# Altium PCB FRDM-MCXN947__Shield_Template.PcbDoc
Units mil, origin at the board's own origin, x right, y up, seen from the top; angles counter-clockwise.
Board outline 4645.67 x 2165.35 mil, 2 copper layers (Top Layer, Bottom Layer), stack 61.7 mil thick; 10 components, 116 nets, 128 pads, 0 vias.
Unrouted connection lines stored in the file: 7.
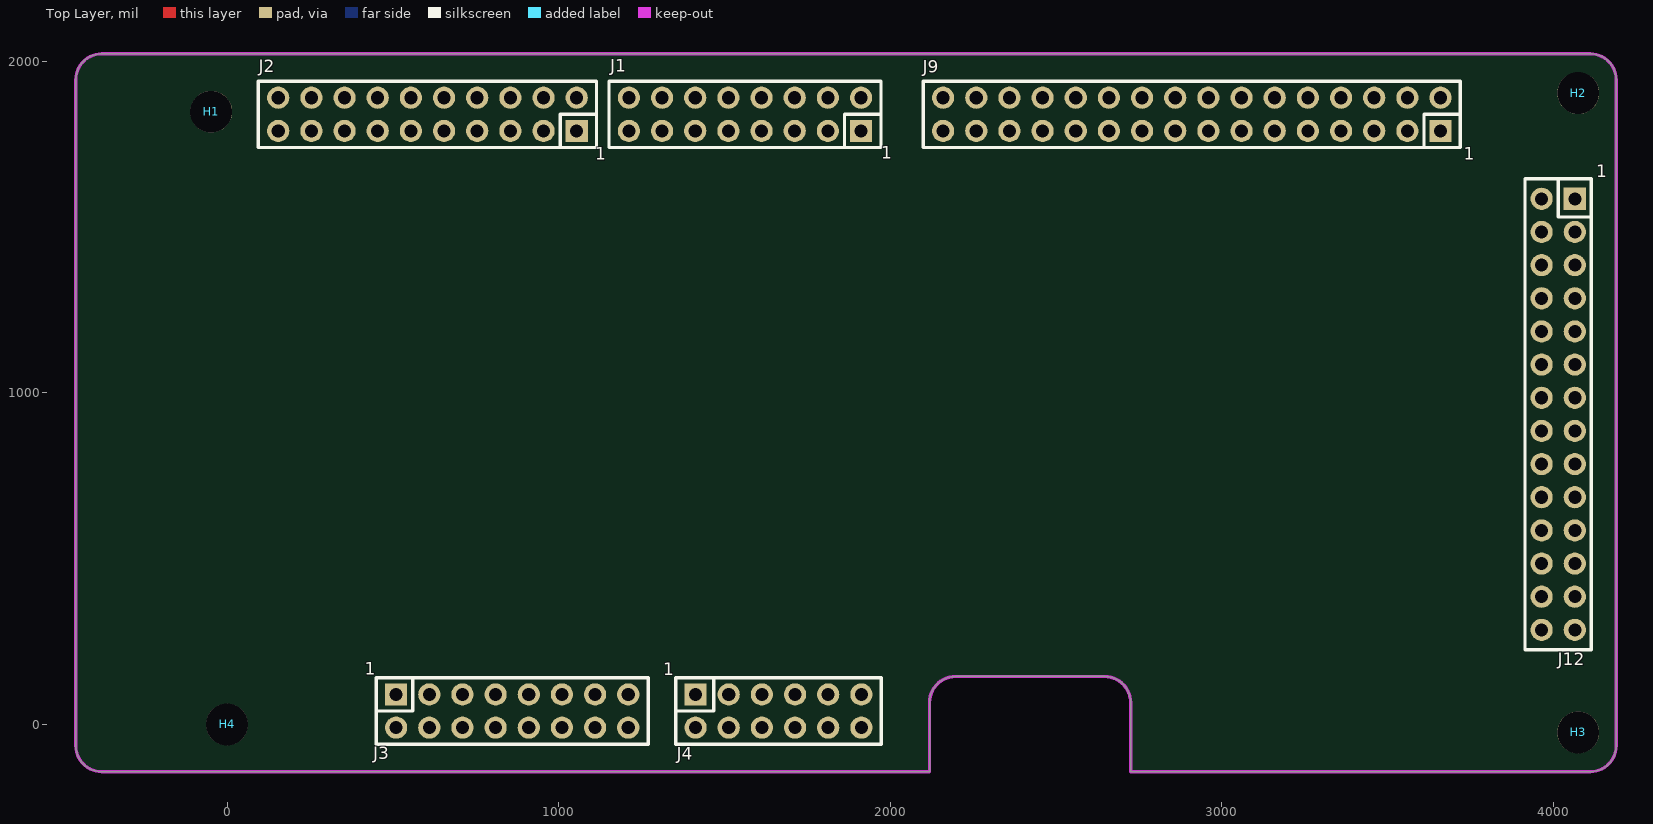
[diagram p0: Top Layer view]
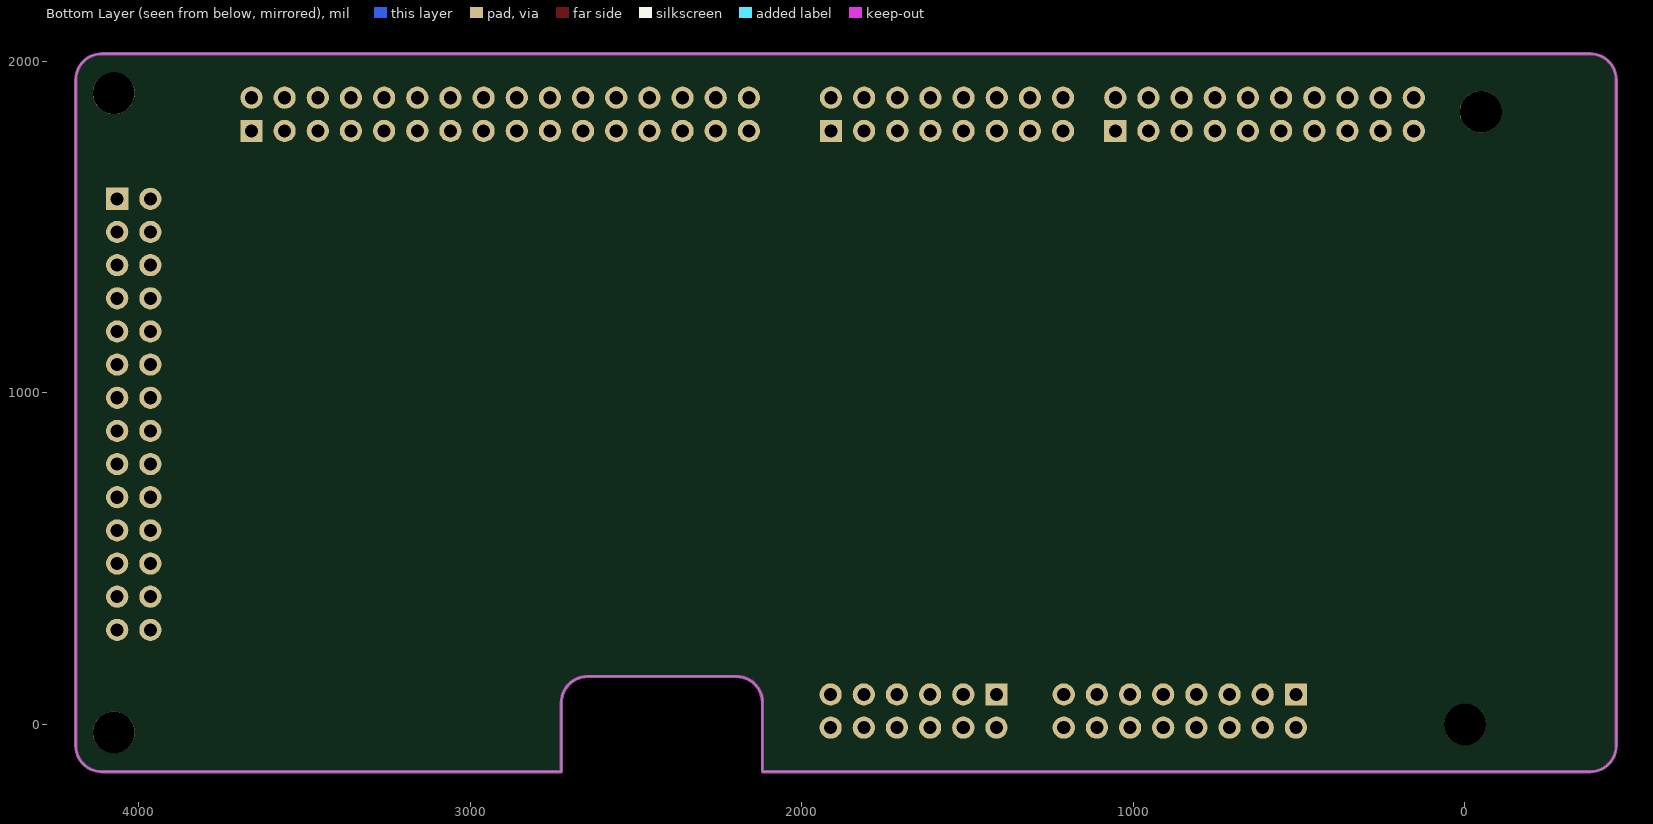
[diagram p1: Bottom Layer view, seen from below]

## Layer stack, top to bottom
Top Solder: solder mask 0.4, Solder Resist, Dk 3.5
Top Layer: signal copper 1.4
Dielectric1: dielectric 58.9, FR-4, Dk 4.8
Bottom Layer: signal copper 1.4
Bottom Solder: solder mask 0.4, Solder Resist, Dk 3.5

## Board outline
-456.18,-63.94 ccw(c-377.44,-63.94) -377.44,-142.68 2118.62,-142.68 2118.62,65.98 cw(c2197.36,65.98) 2197.36,144.72 2646.18,144.72 cw(c2646.18,65.98) 2724.92,65.98 2724.92,-142.68 4110.75,-142.68 ccw(c4110.75,-63.94) 4189.49,-63.94 4189.49,1943.94 ccw(c4110.75,1943.94) 4110.75,2022.68 -377.44,2022.68 ccw(c-377.44,1943.94) -456.18,1943.94

## Design rules (kind name [scope] priority, off if disabled: settings)
Clearance [All] p1: gap=6 ignorepadtopadclearanceinfootprint=FALSE except(0: Arc-Hole Track-Hole SMDPad-Hole THPad-Hole Via-Hole Fill-Hole Poly-Hole Region-Hole Text-Hole)
ComponentClearance [All] p1: gap=0 collisioncheckmode=3 verticalgap=0 showdistances=FALSE
HoleSize [All] p1: absolutevalues=TRUE maxlimit=250 minlimit=1 maxpercent=80.000 minpercent=20.000
MinimumSolderMaskSliver [All] p1: minsoldermaskwidth=1
PolygonConnect [All] p1: connectstyle=Relief reliefconductorwidth=10 reliefentries=4 polygonreliefangle="90 Angle" airgapwidth=10
RoutingVias [All] p1: holewidth=12 width=26 viastyle="Through Hole" minholewidth=12 minwidth=26 maxholewidth=50 maxwidth=75
SilkToSilkClearance [All] p1: silktosilkclearance=0
SilkToSolderMaskClearance SilkscreenOverComponentPads [IsPad] p1: minsilkscreentomaskgap=10 clearancetoexposedcopper=TRUE
SolderMaskExpansion [All] p1: expansion=4 istentingtop=FALSE
Width [All] p1: maxlimit=200 minlimit=6 preferedwidth=6
25 further rules are at their usual default settings.

## Components (designator, comment, footprint, x,y, rotation, side; value= is the part's Value field where it differs from the comment)
H1 "Mechanical_MountingHole" MOUNTINGHOLE_3.2MM_M3 -47.99,1847.99 r0 top value=MountingHole
H2 "Mechanical_MountingHole" MOUNTINGHOLE_3.2MM_M3 4074.72,1904.02 r0 top value=MountingHole
H3 "Mechanical_MountingHole" MOUNTINGHOLE_3.2MM_M3 4074.72,-24.02 r0 top value=MountingHole
H4 "Mechanical_MountingHole" MOUNTINGHOLE_3.2MM_M3 0,0 r0 top value=MountingHole
J1 "SSQ-108-03-T-D" SSQ-108-03-T-D 1562.01,1840 r270 top
J2 "SSQ-110-03-T-D" SSQ-110-03-T-D 604.49,1840 r270 top
J3 "SSQ-108-03-T-D" SSQ-108-03-T-D 860,40.51 r90 top
J4 "SSQ-106-03-T-D" SSQ-106-03-T-D 1662.99,40.51 r90 top
J9 "SSQ-116-03-T-D" SSQ-116-03-T-D 2909.49,1840 r270 top
J12 "SSQ-114-03-T-D" SSQ-114-03-T-D 4014.49,935.24 r0 top

## Footprints (in the part's own frame and the unit in brackets; to place one, negate y for a bottom-side part, rotate by r counter-clockwise, add the part's x,y. Pads: shape width x height; smd on the part's side, far side on the other; paste and mask are expansions set on the pad)
MOUNTINGHOLE_3.2MM_M3 [mm]
  round 3.2 hole 3.2 unplated paste-2539.97 mask+0: Un1(0,0)
SSQ-106-03-T-D [mm]
  rect 1.7x1.7 hole 1 paste-2539.97 mask+0: 1(1.27,6.35)
  rrect100% 1.7x1.7 hole 1 paste-2539.97 mask+0: 2(-1.27,6.35) 3(1.27,3.81) 4(-1.27,3.81) 5(1.27,1.27) 6(-1.27,1.27) 7(1.27,-1.27) 8(-1.27,-1.27) 9(1.27,-3.81) 10(-1.27,-3.81) 11(1.27,-6.35) 12(-1.27,-6.35)
  silkscreen extent -2.54,-7.87 2.54,7.87, body extent -2.48,-7.87 2.48,7.87, height 8.52
SSQ-108-03-T-D [mm]
  rect 1.7x1.7 hole 1 paste-2539.97 mask+0: 1(1.27,8.89)
  rrect100% 1.7x1.7 hole 1 paste-2539.97 mask+0: 2(-1.27,8.89) 3(1.27,6.35) 4(-1.27,6.35) 5(1.27,3.81) 6(-1.27,3.81) 7(1.27,1.27) 8(-1.27,1.27) 9(1.27,-1.27) 10(-1.27,-1.27) 11(1.27,-3.81) 12(-1.27,-3.81) 13(1.27,-6.35) 14(-1.27,-6.35) 15(1.27,-8.89) 16(-1.27,-8.89)
  silkscreen extent -2.54,-10.41 2.54,10.41, body extent -2.48,-10.41 2.48,10.41, height 8.52
SSQ-110-03-T-D [mm]
  rect 1.7x1.7 hole 1 paste-2539.97 mask+0: 1(1.27,11.43)
  rrect100% 1.7x1.7 hole 1 paste-2539.97 mask+0: 2(-1.27,11.43) 3(1.27,8.89) 4(-1.27,8.89) 5(1.27,6.35) 6(-1.27,6.35) 7(1.27,3.81) 8(-1.27,3.81) 9(1.27,1.27) 10(-1.27,1.27) 11(1.27,-1.27) 12(-1.27,-1.27) 13(1.27,-3.81) 14(-1.27,-3.81) 15(1.27,-6.35) 16(-1.27,-6.35) 17(1.27,-8.89) 18(-1.27,-8.89) 19(1.27,-11.43) 20(-1.27,-11.43)
  silkscreen extent -2.54,-12.95 2.54,12.95, body extent -2.48,-12.95 2.48,12.95, height 8.52
SSQ-114-03-T-D [mm]
  rect 1.7x1.7 hole 1 paste-2539.97 mask+0: 1(1.27,16.51)
  rrect100% 1.7x1.7 hole 1 paste-2539.97 mask+0: 2(-1.27,16.51) 3(1.27,13.97) 4(-1.27,13.97) 5(1.27,11.43) 6(-1.27,11.43) 7(1.27,8.89) 8(-1.27,8.89) 9(1.27,6.35) 10(-1.27,6.35) 11(1.27,3.81) 12(-1.27,3.81) 13(1.27,1.27) 14(-1.27,1.27) 15(1.27,-1.27) 16(-1.27,-1.27) 17(1.27,-3.81) 18(-1.27,-3.81) 19(1.27,-6.35) 20(-1.27,-6.35) 21(1.27,-8.89) 22(-1.27,-8.89) 23(1.27,-11.43) 24(-1.27,-11.43) 25(1.27,-13.97) 26(-1.27,-13.97) 27(1.27,-16.51) 28(-1.27,-16.51)
  silkscreen extent -2.54,-18.03 2.54,18.03, body extent -2.48,-18.03 2.48,18.03, height 8.52
SSQ-116-03-T-D [mm]
  rect 1.7x1.7 hole 1 paste-2539.97 mask+0: 1(1.27,19.05)
  rrect100% 1.7x1.7 hole 1 paste-2539.97 mask+0: 2(-1.27,19.05) 3(1.27,16.51) 4(-1.27,16.51) 5(1.27,13.97) 6(-1.27,13.97) 7(1.27,11.43) 8(-1.27,11.43) 9(1.27,8.89) 10(-1.27,8.89) 11(1.27,6.35) 12(-1.27,6.35) 13(1.27,3.81) 14(-1.27,3.81) 15(1.27,1.27) 16(-1.27,1.27) 17(1.27,-1.27) 18(-1.27,-1.27) 19(1.27,-3.81) 20(-1.27,-3.81) 21(1.27,-6.35) 22(-1.27,-6.35) 23(1.27,-8.89) 24(-1.27,-8.89) 25(1.27,-11.43) 26(-1.27,-11.43) 27(1.27,-13.97) 28(-1.27,-13.97) 29(1.27,-16.51) 30(-1.27,-16.51) 31(1.27,-19.05) 32(-1.27,-19.05)
  silkscreen extent -2.54,-20.57 2.54,20.57, body extent -2.48,-20.57 2.48,20.57, height 8.52

## Part data
J1 J3 J4 J9 J12: Manufacturer="Samtec Inc."
  J1 J3: Manufacturer Part Number=SSQ-108-03-T-D
  J4: Manufacturer Part Number=SSQ-106-03-T-D
  J9: Manufacturer P/N=SSQ-116-03-T-D
  J12: Manufacturer Part Number=SSQ-114-03-T-D
J2: Manufacturer="Samtec Inc.", Manufacturer Part Number=SSQ-110-23-T-D
H1 H2 H3 H4: Add into BOM=yes, Convert to PCB=yes, Device=Mechanical_MountingHole, Name=Mechanical_MountingHole, Origin Footprint=MountingHole_3.2mm_M3, Symbol=Mechanical_MountingHole, User doc link=~

## Nets (pads, with @x,y where several pads share a name; then routed paths per layer and width w, separated by ;. In a path a pad name is that pad's centre, name@x,y a point inside that pad or via, vN(x,y) a via of type N, cw(c..) or ccw(c..) an arc to the next point about the centre after c; other vN are vias at no path point)
5v-9v-IN: J3.16
+3v3: J3.4 J3.8 J9.21 J12.1
+5v0: J3.10
ADC0-A0: J4.2
ADC0-A3: J3.2
ADC0-B0: J4.4
ADC1-B0: J2.1
GND: J2.14 J3.12 J3.14 J9.22 J12.2
OP-0-I/P0-20: J4.3
OP-1-INN/P0-4: J4.7
OP-2-INN/P1_10: J4.11
P0-3/P5_5: J2.9
P0-7/DC: J12.8
P0-8/RD: J12.11
P0-9/WR: J12.10
P0-10/P2-4: J2.4
P0-12/CS: J12.9
P0-13/TE: J12.12
P0-14: J4.6
P0-15/P2-0: J4.10
P0-19/TSI0_CH14: J2.13
P0-22: J4.8
P0-23/P1-22: J4.12
P0-24/FC1-SDO: J2.8
P0-25/FC1-SCK: J2.12
P0-26/FC1-SDI: J2.10
P0-27/FC1-CS1: J2.6
P0-28: J2.2
P0-29: J1.8
P0-30/P4-13: J1.10
P0-31: J1.16
P0_4/EZH_CAMERA_VSYNC: J9.17
P0_5/EZH_CAMERA_PCLK: J9.15
P0_11/EZH_CAMERA_HSYNC: J9.18
P1-0/TSI0_CH0: J2.17
P1-1/TSI0_CH1: J2.15
P1-2/P2-3: J1.14
P1-21/P2-7: J1.12
P1-21/SAI1_MCLK: J1.7
P1-22/ENC_A: J3.3
P1-23/P2-6: J1.6
P1_4/EZH_LCD_D0_CAMERA_D0: J9.8
P1_5/EZH_LCD_D1_CAMERA_D1: J9.7
P1_6/EZH_LCD_D2_CAMERA_D2: J9.10
P1_7/EZH_LCD_D3_CAMERA_D3: J9.9
P1_8/FC4_P0_UART_RXD_MCULINK: J9.32
P1_9/FC4_P1_UART_TXD_MCULINK: J9.30
P1_10/EZH_LCD_D6_CAMERA_D6: J9.14
P1_11/EZH_LCD_D7_CAMERA_D7: J9.13
P1_12/EZH_LCD_D8: J9.28
P1_12/TSI0_CH21: J2.11
P1_13/EZH_LCD_D9: J9.27
P1_14/EZH_LCD_D10: J9.2
P1_15/EZH_LCD_D11: J9.1
P1_16/EZH_LCD_D12: J9.4
P1_17/EZH_LCD_D13: J9.3
P1_18/EZH_LCD_D14_CAMERA_PDOWN: J9.6
P1_19/EZH_LCD_D15_CAMERA_RST: J9.5
P1_22/EZH_LCD_DC: J9.24
P1_23/EZH_LCD_RD: J9.23
P2-0/ENC_B: J3.1
P2-2/PWM1_A2: J3.7
P2-3/PWM1_B2: J3.5
P2-4/PWM1_A1: J3.11
P2-5/PWM1_B1: J3.9
P2-6/PWM1_A0: J3.15
P2-7/PWM1_B0: J3.13
P2-8/D0: J12.13
P2-9/D1: J12.14
P2-10/D2: J12.15
P2-11/D3: J12.16
P2_0/EZH_LCD_WR: J9.25
P2_2/CAMERA_CLKIN: J9.16
P3-16/P4-5: J1.1
P3-17/P4-13: J1.3
P3-17/SAI1_TX_FS: J1.11
P3-18/SAI1_RX_BLCK: J1.9
P3-19/SAI1_RX_FS: J1.13
P3-20/SAI1_TXD0: J1.5
P3-21/SAI1_RXD0: J1.15
P3_2/FC7_I2C_SDA: J9.20
P3_3/FC7_I2C_SCL: J9.19
P3_4/EZH_LCD_D4_CAMERA_D4: J9.12
P3_5/EZH_LCD_D5_CAMERA_D5: J9.11
P4-0/FC2-SDA: J12.4
P4-0/P1-16: J2.18
P4-1/FC2-SCL: J12.3
P4-1/P1-17: J2.20
P4-2/TXD2: J1.4
P4-3/RXD2: J1.2
P4-5/BLK: J12.6
P4-6/INT: J12.5
P4-7/RST: J12.7
P4-12/D4: J12.17
P4-12/P0-21: J4.1
P4-13/D5: J12.18
P4-14/D6: J12.19
P4-15/D7: J12.20
P4-16/D8: J12.21
P4-16/P0-18: J4.5
P4-17/D9: J12.22
P4-18/D10: J12.23
P4-19/D11: J12.24
P4-20/D12: J12.25
P4-20/P0-5: J4.9
P4-21/D13: J12.26
P4-22/D14: J12.27
P4-23/D15: J12.28
P4_4/EZH_LCD_CS: J9.26
P5-2/P0-14: J2.3
P5-3/P0-22: J2.5
P5-4: J2.7
P5_8: J9.31
P5_9: J9.29
RESET_B: J3.6
VDDA: J2.16
pads on no net: H1.Un1 H2.Un1 H3.Un1 H4.Un1 J2.19

## Keep-outs
Keep-Out Layer:
  lines w0: -456.18,-63.94 ccw(c-377.44,-63.94) -377.44,-142.68 2118.62,-142.68 2118.62,65.98 cw(c2197.36,65.98) 2197.36,144.72 2646.18,144.72 cw(c2646.18,65.98) 2724.92,65.98 2724.92,-142.68 4110.75,-142.68 ccw(c4110.75,-63.94) 4189.49,-63.94 4189.49,1943.94 ccw(c4110.75,1943.94) 4110.75,2022.68 -377.44,2022.68 ccw(c-377.44,1943.94) -456.18,1943.94 -456.18,-63.94
  lines w10: -456.18,-63.94 ccw(c-377.44,-63.94) -377.44,-142.68 2118.62,-142.68 2118.62,65.98 cw(c2197.36,65.98) 2197.36,144.72 2646.18,144.72 cw(c2646.18,65.98) 2724.92,65.98 2724.92,-142.68 4110.75,-142.68 ccw(c4110.75,-63.94) 4189.49,-63.94 4189.49,1943.94 ccw(c4110.75,1943.94) 4110.75,2022.68 -377.44,2022.68 ccw(c-377.44,1943.94) -456.18,1943.94 -456.18,-63.94

## Silkscreen, mask and mechanical layers (free items; w line width, h text height)
Top Overlay:
  text "1" at 1972.87,1692.12 h65
  text "1" at 1110.87,1689.12 h65
  text "1" at 3729.87,1689.12 h65
  text "1" at 4129.87,1637.12 h65
  text "1" at 415.87,136.12 h65
  text "1" at 1315.87,135.12 h65
  text "Note: The positioning of the connectors in the PCB are at coordinates that seem \"off\" by 2-6mil. This was a design bug in the FRDM-MCX947 PCB design. The connectors don't quite match to true arduino positioning,  but are close enough that boards will mate." at 462,-562.01 h75
  text "Note:   Always double check pin header IO assignments and mechanicals.  This template was created using the latest available documentation for the FRDM MCX-N947. Efforts were made to ensure mechanical/electrical accuracy.   /  / This template is distributed in the hope that it will be useful, but WITHOUT ANY WARRANTY; without even the implied warranty of MERCHANTABILITY or FITNESS FOR A PARTICULAR PURPOSE" at 474,-1140.03 h75